# EAGLE board ESP-D1-mini-mainboard-Panel (EAGLE 9.6.2)
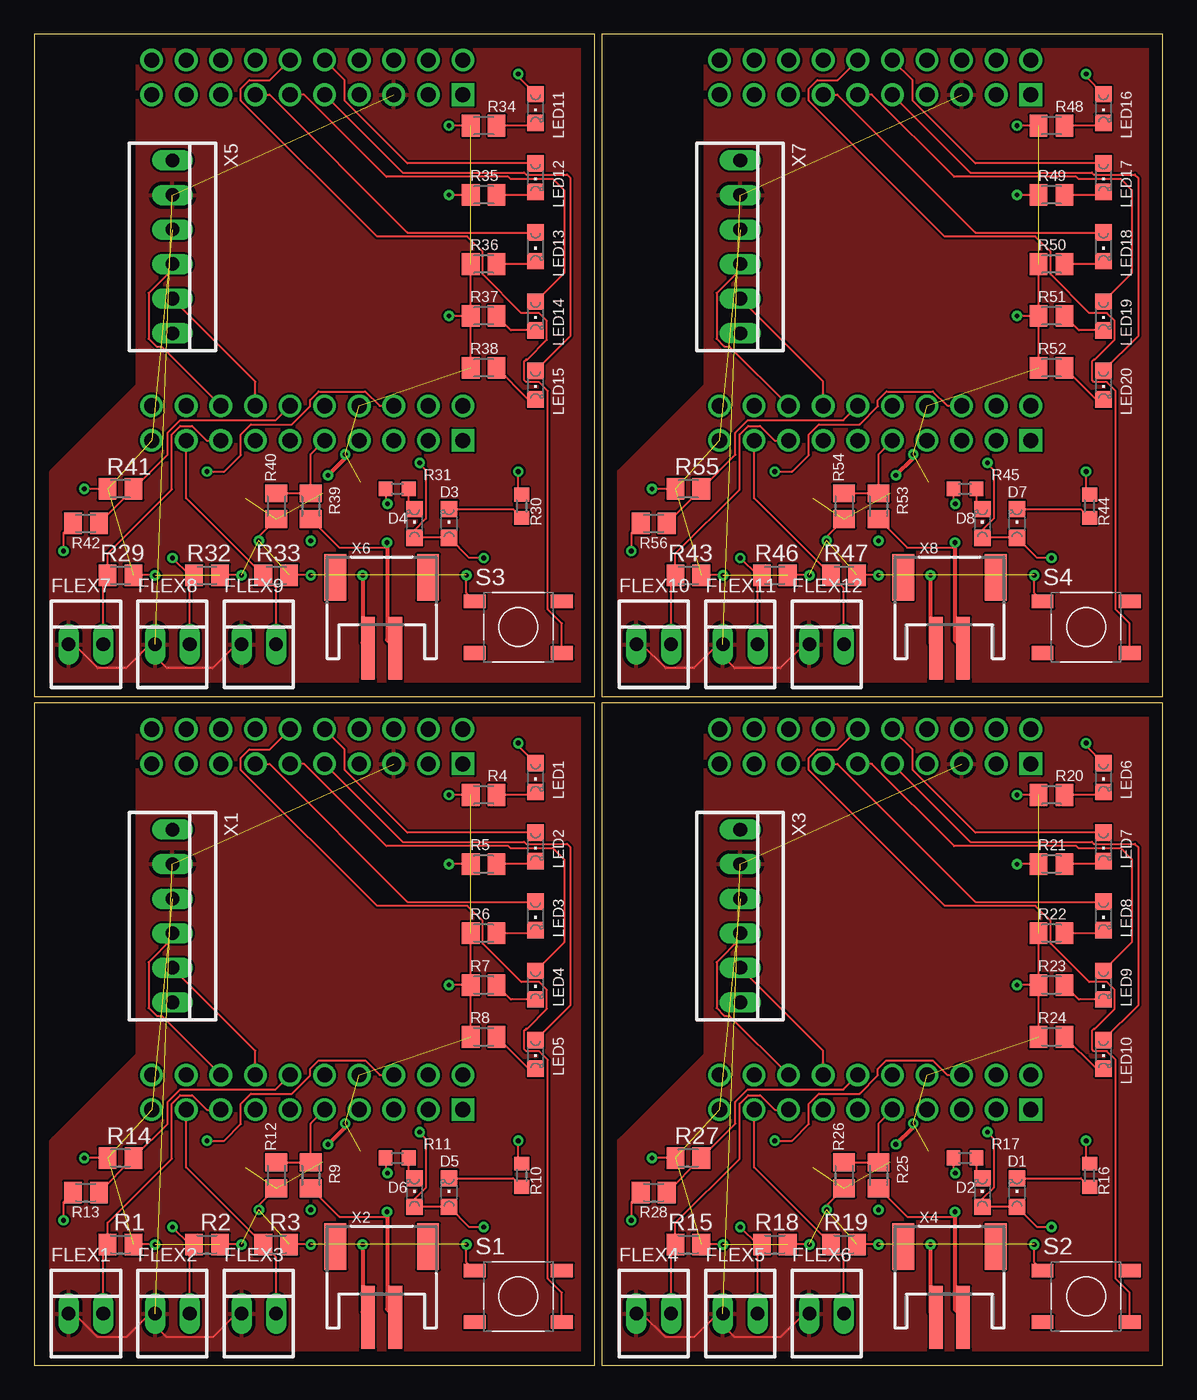
[diagram p0: board, top side]
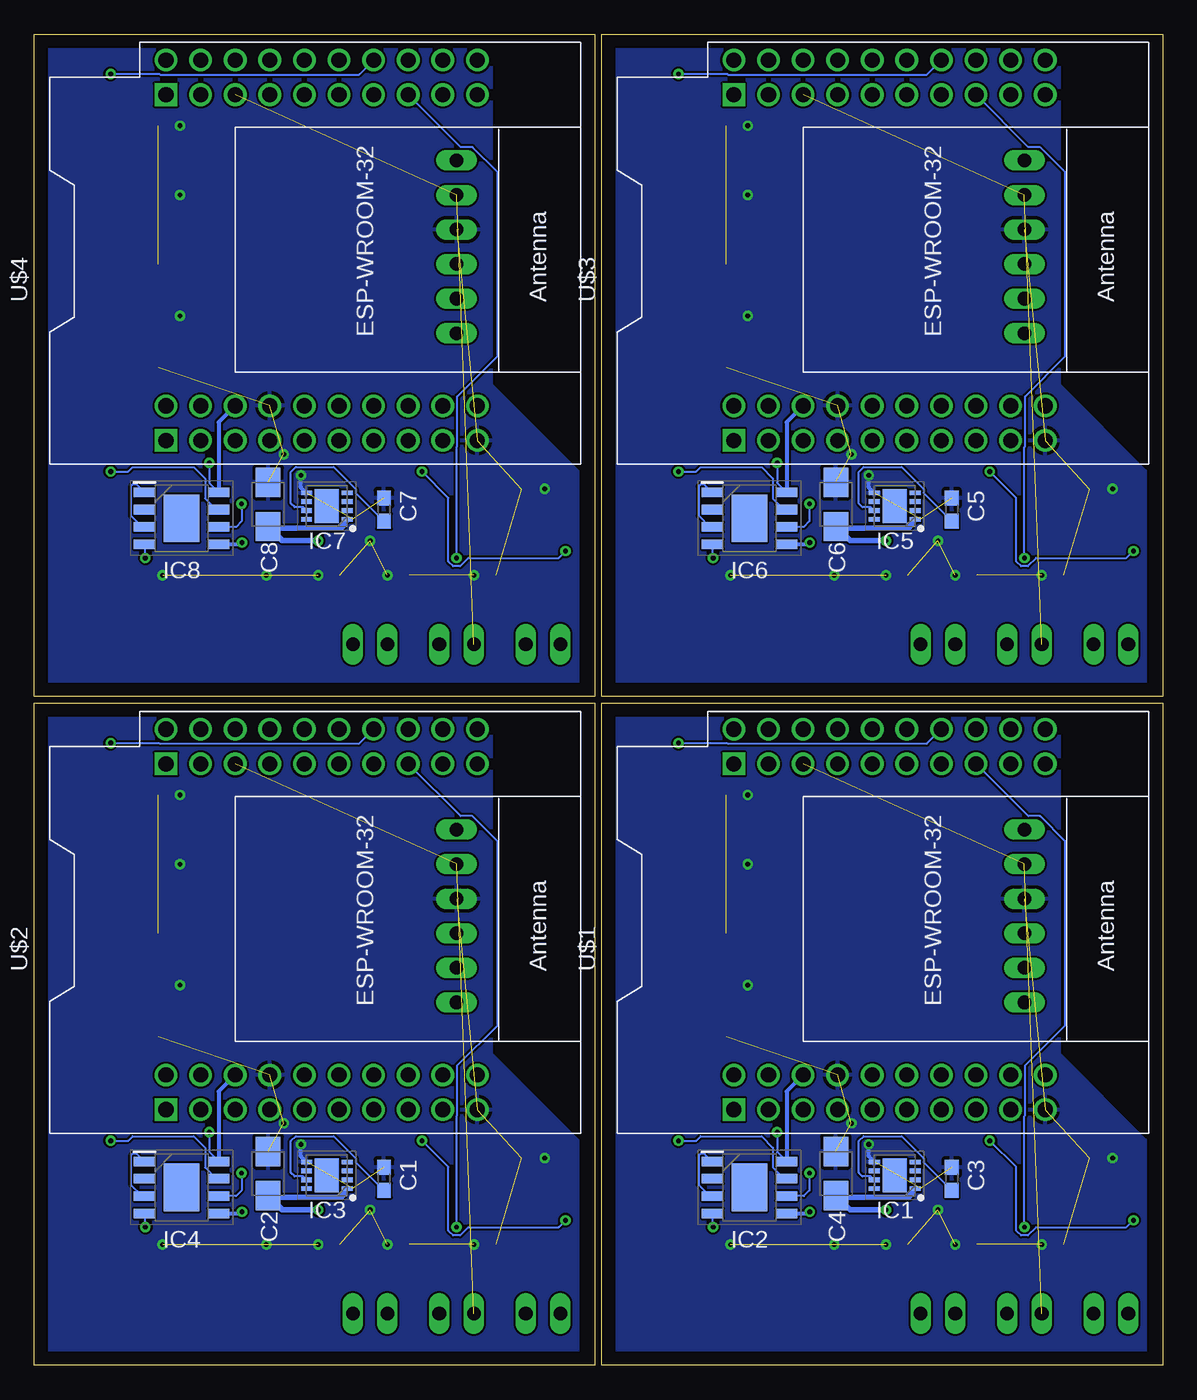
[diagram p1: board, bottom side, seen from below]

Size 82.89 x 97.81 mm. Coordinates in mm from the lower left corner, seen from the top.
Outline: 0,0 41.19,0 41.19,48.65 0,48.65 0,0
Outline: 41.7,0 82.89,0 82.89,48.65 41.7,48.65 41.7,0
Outline: 0,49.16 41.19,49.16 41.19,97.81 0,97.81 0,49.16
Outline: 41.7,49.16 82.89,49.16 82.89,97.81 41.7,97.81 41.7,49.16
Copper layers (1*16): Top 0.035mm / dielectric 1.5mm / Bottom 0.035mm
Design rules "ESP-D1-mini-mainboard": minimum track width 6mil, minimum drill 0.35mm, track to track 6mil, track to pad 6mil, pad to pad 6mil, via to via 6mil, smd to smd 6mil, copper to edge 40mil, drill to drill 6mil, minimum pad ring 10mil, minimum via ring 8mil, stop-mask expansion 4mil, vias tented up to drill 0mil, thermal gap 10mil
Net classes: 2 VCC: width 0.4 mm

## Footprints (pad centres in the part's own frame; a part is rotated, then mirrored left to right if it is on the bottom)
C0603 = smd 1.1 x 1: 1 -0.85,0; 2 0.85,0
B/3528-21W = smd 2.15 x 1.8: + 1.625,0; - -1.625,0
CHIPLED_0805 = smd 1.2 x 1.2: A 0,-1.05; C 0,1.05
22-23-2021 = drill 1 long: 1 -1.27,0; 2 1.27,0
SON65P300X300X100-9N = smd 0.8 x 0.35: 1 -1.5,0.975; 2 -1.5,0.325; 3 -1.5,-0.325; 4 -1.5,-0.975; 5 1.5,-0.975; 6 1.5,-0.325; 7 1.5,0.325; 8 1.5,0.975 | smd 1.75 x 2.5: 9 0,0
SOIC127P600X170-9N = smd 1.55 x 0.7: 1 -2.725,1.905; 2 -2.725,0.635; 3 -2.725,-0.635; 4 -2.725,-1.905; 5 2.725,-1.905; 6 2.725,-0.635; 7 2.725,0.635; 8 2.725,1.905 | smd 2.6 x 3.5: 9 0,0
M0805 = smd 1.3 x 1.6: 1 -0.95,0; 2 0.95,0
R0603 = smd 1 x 1.1: 1 -0.85,0; 2 0.85,0
BUTTON_4_PAD = smd 1.6 x 1: 1 -3.2,1.9; 2 3.2,1.9; 3 -3.2,-1.9; 4 3.2,-1.9
MH-ET_ESP32_D1_MINI = drill 1.11 pad 1.665: 3V3 25.4,-5.08; CMD 27.94,0; GND 0,-22.86; GND2 2.54,-7.62; GND3 27.94,-22.86; IO0 0,-7.62; IO2 0,-5.08; IO4 0,-10.16; IO5 25.4,-7.62; IO16 2.54,-10.16; IO17 2.54,-12.7; IO18 25.4,-15.24; IO19 25.4,-12.7; IO21 2.54,-15.24; IO22 2.54,-17.78; IO23 25.4,-10.16; IO25 0,-17.78; IO26 25.4,-17.78; IO27 0,-20.32; IO32 0,-15.24; IO33 27.94,-12.7; IO34 27.94,-10.16; IO35 27.94,-15.24; NC 27.94,-20.32; NC2 27.94,-5.08; RST 25.4,-22.86; RXD 2.54,-20.32; SD0 2.54,0; SD1 0,-2.54; SD2 27.94,-2.54; SVN 27.94,-17.78; SVP 25.4,-20.32; TCK 25.4,-2.54; TD0 2.54,-2.54; TDI 0,-12.7; TMS 27.94,-7.62; TXD 2.54,-22.86; VCC 2.54,-5.08 | drill 1.11 pad 1.665 square: CLK 0,0; SD3 25.4,0
22-23-2061 = drill 1 long: 1 -6.35,0; 2 -3.81,0; 3 -1.27,0; 4 1.27,0; 5 3.81,0; 6 6.35,0
JSTPH2 = smd 1 x 4.6: 1 -1,-3.7; 2 1,-3.7 | smd 1.6 x 3.4: NC1 -3.4,1.5; NC2 3.4,1.5

## Placement (x,y rotation side)
C1  10u  [C0603]  57.19,13.72 90 bottom
C2  100u  [B/3528-21W]  65.7,14.1 270 bottom
C3  10u  [C0603]  15.49,13.72 90 bottom
C4  100u  [B/3528-21W]  24,14.1 270 bottom
C5  10u  [C0603]  15.49,62.88 90 bottom
C6  100u  [B/3528-21W]  24,63.26 270 bottom
C7  10u  [C0603]  57.19,62.88 90 bottom
C8  100u  [B/3528-21W]  65.7,63.26 270 bottom
D1  GREEN  [CHIPLED_0805]  72.18,12.7 0 top
D2  GREEN  [CHIPLED_0805]  69.64,12.7 0 top
D3  GREEN  [CHIPLED_0805]  30.48,61.86 0 top
D4  GREEN  [CHIPLED_0805]  27.94,61.86 0 top
D5  GREEN  [CHIPLED_0805]  30.48,12.7 0 top
D6  GREEN  [CHIPLED_0805]  27.94,12.7 0 top
D7  GREEN  [CHIPLED_0805]  72.18,61.86 0 top
D8  GREEN  [CHIPLED_0805]  69.64,61.86 0 top
FLEX1  22-23-2021  [22-23-2021]  3.81,3.81 0 top
FLEX2  22-23-2021  [22-23-2021]  10.16,3.81 0 top
FLEX3  22-23-2021  [22-23-2021]  16.51,3.81 0 top
FLEX4  22-23-2021  [22-23-2021]  45.51,3.81 0 top
FLEX5  22-23-2021  [22-23-2021]  51.86,3.81 0 top
FLEX6  22-23-2021  [22-23-2021]  58.21,3.81 0 top
FLEX7  22-23-2021  [22-23-2021]  3.81,52.97 0 top
FLEX8  22-23-2021  [22-23-2021]  10.16,52.97 0 top
FLEX9  22-23-2021  [22-23-2021]  16.51,52.97 0 top
FLEX10  22-23-2021  [22-23-2021]  45.51,52.97 0 top
FLEX11  22-23-2021  [22-23-2021]  51.86,52.97 0 top
FLEX12  22-23-2021  [22-23-2021]  58.21,52.97 0 top
IC1  TPS78533QWDRBRQ1  [SON65P300X300X100-9N]  19.68,13.97 180 bottom
IC2  DIO5508XS8  [SOIC127P600X170-9N]  30.35,13.08 0 bottom
IC3  TPS78533QWDRBRQ1  [SON65P300X300X100-9N]  61.38,13.97 180 bottom
IC4  DIO5508XS8  [SOIC127P600X170-9N]  72.05,13.08 0 bottom
IC5  TPS78533QWDRBRQ1  [SON65P300X300X100-9N]  19.68,63.13 180 bottom
IC6  DIO5508XS8  [SOIC127P600X170-9N]  30.35,62.24 0 bottom
IC7  TPS78533QWDRBRQ1  [SON65P300X300X100-9N]  61.38,63.13 180 bottom
IC8  DIO5508XS8  [SOIC127P600X170-9N]  72.05,62.24 0 bottom
LED1  [CHIPLED_0805]  36.83,43.18 180 top
LED2  [CHIPLED_0805]  36.83,38.1 180 top
LED3  [CHIPLED_0805]  36.83,33.02 180 top
LED4  [CHIPLED_0805]  36.83,27.94 180 top
LED5  [CHIPLED_0805]  36.83,22.86 180 top
LED6  [CHIPLED_0805]  78.53,43.18 180 top
LED7  [CHIPLED_0805]  78.53,38.1 180 top
LED8  [CHIPLED_0805]  78.53,33.02 180 top
LED9  [CHIPLED_0805]  78.53,27.94 180 top
LED10  [CHIPLED_0805]  78.53,22.86 180 top
LED11  [CHIPLED_0805]  36.83,92.34 180 top
LED12  [CHIPLED_0805]  36.83,87.26 180 top
LED13  [CHIPLED_0805]  36.83,82.18 180 top
LED14  [CHIPLED_0805]  36.83,77.1 180 top
LED15  [CHIPLED_0805]  36.83,72.02 180 top
LED16  [CHIPLED_0805]  78.53,92.34 180 top
LED17  [CHIPLED_0805]  78.53,87.26 180 top
LED18  [CHIPLED_0805]  78.53,82.18 180 top
LED19  [CHIPLED_0805]  78.53,77.1 180 top
LED20  [CHIPLED_0805]  78.53,72.02 180 top
R1  15K  [M0805]  6.35,8.89 180 top
R2  15K  [M0805]  12.7,8.89 180 top
R3  15K  [M0805]  17.78,8.89 180 top
R4  1k  [M0805]  33.02,41.91 0 top
R5  1k  [M0805]  33.02,36.83 0 top
R6  1k  [M0805]  33.02,31.75 0 top
R7  1k  [M0805]  33.02,27.94 0 top
R8  1k  [M0805]  33.02,24.13 0 top
R9  10k  [M0805]  20.32,13.97 90 top
R10  470  [R0603]  35.81,13.97 270 top
R11  470  [R0603]  26.67,15.24 0 top
R12  10k  [M0805]  17.78,13.97 90 top
R13  2k  [M0805]  3.81,12.7 180 top
R14  3k  [M0805]  6.35,15.24 0 top
R15  15K  [M0805]  48.05,8.89 180 top
R16  470  [R0603]  77.51,13.97 270 top
R17  470  [R0603]  68.37,15.24 0 top
R18  15K  [M0805]  54.4,8.89 180 top
R19  15K  [M0805]  59.48,8.89 180 top
R20  1k  [M0805]  74.72,41.91 0 top
R21  1k  [M0805]  74.72,36.83 0 top
R22  1k  [M0805]  74.72,31.75 0 top
R23  1k  [M0805]  74.72,27.94 0 top
R24  1k  [M0805]  74.72,24.13 0 top
R25  10k  [M0805]  62.02,13.97 90 top
R26  10k  [M0805]  59.48,13.97 90 top
R27  3k  [M0805]  48.05,15.24 0 top
R28  2k  [M0805]  45.51,12.7 180 top
R29  15K  [M0805]  6.35,58.05 180 top
R30  470  [R0603]  35.81,63.13 270 top
R31  470  [R0603]  26.67,64.4 0 top
R32  15K  [M0805]  12.7,58.05 180 top
R33  15K  [M0805]  17.78,58.05 180 top
R34  1k  [M0805]  33.02,91.07 0 top
R35  1k  [M0805]  33.02,85.99 0 top
R36  1k  [M0805]  33.02,80.91 0 top
R37  1k  [M0805]  33.02,77.1 0 top
R38  1k  [M0805]  33.02,73.29 0 top
R39  10k  [M0805]  20.32,63.13 90 top
R40  10k  [M0805]  17.78,63.13 90 top
R41  3k  [M0805]  6.35,64.4 0 top
R42  2k  [M0805]  3.81,61.86 180 top
R43  15K  [M0805]  48.05,58.05 180 top
R44  470  [R0603]  77.51,63.13 270 top
R45  470  [R0603]  68.37,64.4 0 top
R46  15K  [M0805]  54.4,58.05 180 top
R47  15K  [M0805]  59.48,58.05 180 top
R48  1k  [M0805]  74.72,91.07 0 top
R49  1k  [M0805]  74.72,85.99 0 top
R50  1k  [M0805]  74.72,80.91 0 top
R51  1k  [M0805]  74.72,77.1 0 top
R52  1k  [M0805]  74.72,73.29 0 top
R53  10k  [M0805]  62.02,63.13 90 top
R54  10k  [M0805]  59.48,63.13 90 top
R55  3k  [M0805]  48.05,64.4 0 top
R56  2k  [M0805]  45.51,61.86 180 top
S1  BUTTON  [BUTTON_4_PAD]  35.56,5.08 0 top
S2  BUTTON  [BUTTON_4_PAD]  77.26,5.08 0 top
S3  BUTTON  [BUTTON_4_PAD]  35.56,54.24 0 top
S4  BUTTON  [BUTTON_4_PAD]  77.26,54.24 0 top
U$1  MH-ET_ESP32_D1_MINI  [MH-ET_ESP32_D1_MINI]  31.5,18.8 90 bottom
U$2  MH-ET_ESP32_D1_MINI  [MH-ET_ESP32_D1_MINI]  73.2,18.8 90 bottom
U$3  MH-ET_ESP32_D1_MINI  [MH-ET_ESP32_D1_MINI]  31.5,67.96 90 bottom
U$4  MH-ET_ESP32_D1_MINI  [MH-ET_ESP32_D1_MINI]  73.2,67.96 90 bottom
X1  [22-23-2061]  10.16,33.02 270 top
X2  JSTPH  [JSTPH2]  25.53,7.24 0 top
X3  [22-23-2061]  51.86,33.02 270 top
X4  JSTPH  [JSTPH2]  67.23,7.24 0 top
X5  [22-23-2061]  10.16,82.18 270 top
X6  JSTPH  [JSTPH2]  25.53,56.4 0 top
X7  [22-23-2061]  51.86,82.18 270 top
X8  JSTPH  [JSTPH2]  67.23,56.4 0 top

## Library data of the parts
C1-C8 = rcl; SPICEPREFIX: C
D1-D8 LED1-LED20 R1-R9 R12-R15 R18-R29 R32-R43 R46-R56 = adafruit
FLEX1-FLEX12 = con-molex; MF: MOLEX; MPN: 22-23-2021; OC_FARNELL: 1462926; OC_NEWARK: 25C3832
IC1 IC3 IC5 IC7 = TPS78533QWDRBRQ1; DESCRIPTION: LDO Voltage Regulators Automotive, 1-A, high-accuracy, adjustable low-dropout (LDO) linear regulator; HEIGHT: 1mm; MANUFACTURER_NAME: Texas Instruments; MANUFACTURER_PART_NUMBER: TPS78533QWDRBRQ1; MOUSER_PART_NUMBER: 595-TPS78533QWDRBRQ1; MOUSER_PRICE-STOCK: https://www.mouser.co.uk/ProductDetail/Texas-Instruments/TPS78533QWDRBRQ1?qs=iLbezkQI%252BsiNbdqh2Ko9GQ%3D%3D
IC2 IC4 IC6 IC8 = DIO5508XS8; DESCRIPTION: Battery Management 1A Lithium Ion Battery Charger IC; HEIGHT: 1.7mm; MANUFACTURER_NAME: DIOO Microcircuits; MANUFACTURER_PART_NUMBER: DIO5508XS8; MOUSER_PART_NUMBER: 453-DIO5508XS8; MOUSER_PRICE-STOCK: https://www.mouser.co.uk/ProductDetail/DIOO-Microcircuits/DIO5508XS8?qs=wUXugUrL1qzPv8nEmpxvyA%3D%3D
R10 R11 R16 R17 R30 R31 R44 R45 = rcl; SPICEPREFIX: R
S1-S4 = NFR; DESCRIPTION: Tactile Switch SPST-NO Top Actuated Surface Mount; DIGI-KEY_PART_NUMBER: CKN9104TR-ND; MF: C&K; MP: PTS525SM15SMTR2 LFS; PACKAGE: Tactile Switch CK; PURCHASE-URL: https://pricing.snapeda.com/search/part/PTS525SM15SMTR2 LFS/?ref=eda
U$1-U$4 = MH-ET_ESP32_D1_MINI
X1 X3 X5 X7 = con-molex; MF: MOLEX; MPN: 22-23-2061; OC_FARNELL: 1462922; OC_NEWARK: 27C1933
X2 X4 X6 X8 = microbuilder

## Nets
3V1: FLEX4.1 FLEX5.1 FLEX6.1 U$2.3V3 X3.2
3V2: FLEX7.1 FLEX8.1 FLEX9.1 U$3.3V3 X5.2
3V3: FLEX1.1 FLEX2.1 FLEX3.1 U$1.3V3 X1.2
3V4: FLEX10.1 FLEX11.1 FLEX12.1 U$4.3V3 X7.2
5V: D5.A D6.A IC2.4 IC2.8 R13.2 U$1.VCC
5V1: D1.A D2.A IC4.4 IC4.8 R28.2 U$2.VCC
5V2: D3.A D4.A IC6.4 IC6.8 R42.2 U$3.VCC
5V3: D7.A D8.A IC8.4 IC8.8 R56.2 U$4.VCC
5V_SENSE: R13.1 R14.2 U$1.IO17
5V_SENSE1: R27.2 R28.1 U$2.IO17
5V_SENSE2: R41.2 R42.1 U$3.IO17
5V_SENSE3: R55.2 R56.1 U$4.IO17
+3V1 [VCC]: C2.+ IC3.1
+3V2 [VCC]: C6.+ IC5.1
+3V3 [VCC]: C4.+ IC1.1
+3V4 [VCC]: C8.+ IC7.1
BAT_SENSE: R9.2 R12.2 U$1.IO4
BAT_SENSE1: R25.2 R26.2 U$2.IO4
BAT_SENSE2: R39.2 R40.2 U$3.IO4
BAT_SENSE3: R53.2 R54.2 U$4.IO4
GND: C3.2 C4.- IC1.5 R1.1 R2.1 R3.1 R4.1 R5.1 R6.1 R7.1 R8.1 R12.1 R14.1 S1.1 U$1.GND U$1.GND2 X1.3 X2.1
GND1: C1.2 C2.- IC3.5 R15.1 R18.1 R19.1 R20.1 R21.1 R22.1 R23.1 R24.1 R26.1 R27.1 S2.1 U$2.GND U$2.GND2 X3.3 X4.1
GND2: C5.2 C6.- IC5.5 R29.1 R32.1 R33.1 R34.1 R35.1 R36.1 R37.1 R38.1 R40.1 R41.1 S3.1 U$3.GND U$3.GND2 X5.3 X6.1
GND3: C7.2 C8.- IC7.5 R43.1 R46.1 R47.1 R48.1 R49.1 R50.1 R51.1 R52.1 R54.1 R55.1 S4.1 U$4.GND U$4.GND2 X7.3 X8.1
N$1: LED1.C R4.2
N$2: LED2.C R5.2
N$3: LED3.C R6.2
N$4: LED4.C R7.2
N$5: LED5.C R8.2
N$6: FLEX1.2 R1.2 U$1.IO25
N$7: FLEX2.2 R2.2 U$1.IO26
N$8: FLEX3.2 R3.2 U$1.IO27
N$9: LED1.A U$1.IO35
N$10: LED2.A U$1.IO34
N$11: S1.4 U$1.IO33
N$12: LED3.A U$1.IO18
N$13: IC2.1 IC2.3
N$14: D5.C R10.2
N$15: D6.C R11.2
N$16: IC2.7 R10.1
N$17: IC2.6 R11.1
N$18: C3.1 IC1.7 IC1.8
N$19: LED4.A U$1.IO19
N$20: LED5.A U$1.IO23
N$21: FLEX4.2 R15.2 U$2.IO25
N$22: FLEX5.2 R18.2 U$2.IO26
N$23: FLEX6.2 R19.2 U$2.IO27
N$24: S2.4 U$2.IO33
N$25: IC4.1 IC4.3
N$26: D1.C R16.2
N$27: D2.C R17.2
N$28: IC4.7 R16.1
N$29: IC4.6 R17.1
N$30: C1.1 IC3.7 IC3.8
N$31: LED6.C R20.2
N$32: LED7.C R21.2
N$33: LED8.C R22.2
N$34: LED9.C R23.2
N$35: LED10.C R24.2
N$36: LED6.A U$2.IO35
N$37: LED7.A U$2.IO34
N$38: LED8.A U$2.IO18
N$39: LED9.A U$2.IO19
N$40: LED10.A U$2.IO23
N$41: FLEX7.2 R29.2 U$3.IO25
N$42: FLEX8.2 R32.2 U$3.IO26
N$43: FLEX9.2 R33.2 U$3.IO27
N$44: S3.4 U$3.IO33
N$45: IC6.1 IC6.3
N$46: D3.C R30.2
N$47: D4.C R31.2
N$48: IC6.7 R30.1
N$49: IC6.6 R31.1
N$50: C5.1 IC5.7 IC5.8
N$51: LED11.C R34.2
N$52: LED12.C R35.2
N$53: LED13.C R36.2
N$54: LED14.C R37.2
N$55: LED15.C R38.2
N$56: LED11.A U$3.IO35
N$57: LED12.A U$3.IO34
N$58: LED13.A U$3.IO18
N$59: LED14.A U$3.IO19
N$60: LED15.A U$3.IO23
N$61: FLEX10.2 R43.2 U$4.IO25
N$62: FLEX11.2 R46.2 U$4.IO26
N$63: FLEX12.2 R47.2 U$4.IO27
N$64: S4.4 U$4.IO33
N$65: IC8.1 IC8.3
N$66: D7.C R44.2
N$67: D8.C R45.2
N$68: IC8.7 R44.1
N$69: IC8.6 R45.1
N$70: C7.1 IC7.7 IC7.8
N$71: LED16.C R48.2
N$72: LED17.C R49.2
N$73: LED18.C R50.2
N$74: LED19.C R51.2
N$75: LED20.C R52.2
N$76: LED16.A U$4.IO35
N$77: LED17.A U$4.IO34
N$78: LED18.A U$4.IO18
N$79: LED19.A U$4.IO19
N$80: LED20.A U$4.IO23
SCL: U$1.IO22 X1.4
SCL1: U$2.IO22 X3.4
SCL2: U$3.IO22 X5.4
SCL3: U$4.IO22 X7.4
SDA: U$1.IO21 X1.5
SDA1: U$2.IO21 X3.5
SDA2: U$3.IO21 X5.5
SDA3: U$4.IO21 X7.5
VBAT: IC2.5 R9.1 X2.2
VBAT1: IC4.5 R25.1 X4.2
VBAT2: IC6.5 R39.1 X6.2
VBAT3: IC8.5 R53.1 X8.2

## Tracks (layer width: path | path; a pad name or v marks a point on that pad's centre or on a via)
3V1  (2 unrouted)
  Top 0.152: FLEX6.1 56.54,3.81 54.81,2.07 51.45,2.07 50.59,2.94 FLEX5.1 50.19,3.81 48.46,2.07 46.37,2.07 44.64,3.81 FLEX4.1
  pour Top: 42.97,0 42.97,16.51 49.32,22.86 49.32,48.26 82.34,48.26 82.34,0
3V2  (2 unrouted)
  Top 0.152: FLEX9.1 14.84,52.97 13.11,51.23 9.75,51.23 8.89,52.1 FLEX8.1 8.49,52.97 6.76,51.23 4.67,51.23 2.94,52.97 FLEX7.1
  pour Top: 1.27,49.16 1.27,65.67 7.62,72.02 7.62,97.42 40.64,97.42 40.64,49.16
3V3  (2 unrouted)
  Top 0.152: FLEX3.1 14.84,3.81 13.11,2.07 9.75,2.07 8.89,2.94 FLEX2.1 8.49,3.81 6.76,2.07 4.67,2.07 2.94,3.81 FLEX1.1
  pour Top: 1.27,0 1.27,16.51 7.62,22.86 7.62,48.26 40.64,48.26 40.64,0
3V4  (2 unrouted)
  Top 0.152: FLEX12.1 56.54,52.97 54.81,51.23 51.45,51.23 50.59,52.1 FLEX11.1 50.19,52.97 48.46,51.23 46.37,51.23 44.64,52.97 FLEX10.1
  pour Top: 42.97,49.16 42.97,65.67 49.32,72.02 49.32,97.42 82.34,97.42 82.34,49.16
5V  (via drill 0.35)
  Top 0.152: v33.02,10.16 31.97,10.16 D5.A D6.A 27.94,12.23 28.77,13.05 28.77,16.64 28.32,17.08 v28.32,17.14 | R13.2 2.16,12 v2.16,10.67 | v12.7,16.51 13.97,16.51 15.2,17.73 15.2,19.24 15.93,19.97 18.93,19.97 20.27,21.31 20.27,21.78 20.9,22.4 24.32,22.4 25.38,21.34 U$1.VCC
  Bottom 0.152: IC2.4 33.08,10.22 v33.02,10.16 | IC2.8 28.32,15.68 v28.32,17.14 | v2.16,10.67 2.67,10.16 9.3,10.16 9.91,9.55 10.41,9.55 10.77,9.91 10.77,14.58 v12.7,16.51
  Bottom 0.305: U$1.VCC 27.63,20.12 IC2.8
5V1  (via drill 0.35)
  Top 0.152: v74.72,10.16 73.67,10.16 D1.A D2.A 69.64,12.23 70.47,13.05 70.47,16.64 70.02,17.08 v70.02,17.14 | R28.2 43.86,12 v43.86,10.67 | v54.4,16.51 55.67,16.51 56.89,17.73 56.89,19.24 57.63,19.97 60.63,19.97 61.97,21.31 61.97,21.78 62.6,22.4 66.02,22.4 67.08,21.34 U$2.VCC
  Bottom 0.152: IC4.4 74.78,10.22 v74.72,10.16 | IC4.8 70.02,15.68 v70.02,17.14 | v43.86,10.67 44.37,10.16 51,10.16 51.61,9.55 52.11,9.55 52.47,9.91 52.47,14.58 v54.4,16.51
  Bottom 0.305: U$2.VCC 69.33,20.12 IC4.8
5V2  (via drill 0.35)
  Top 0.152: v33.02,59.32 31.97,59.32 D3.A D4.A 27.94,61.39 28.77,62.21 28.77,65.79 28.32,66.24 v28.32,66.3 | R42.2 2.16,61.16 v2.16,59.83 | v12.7,65.67 13.97,65.67 15.2,66.89 15.2,68.39 15.93,69.13 18.93,69.13 20.27,70.47 20.27,70.94 20.9,71.56 24.32,71.56 25.38,70.5 U$3.VCC
  Bottom 0.152: IC6.4 33.08,59.38 v33.02,59.32 | IC6.8 28.32,64.84 v28.32,66.3 | v2.16,59.83 2.67,59.32 9.3,59.32 9.91,58.71 10.41,58.71 10.77,59.07 10.77,63.74 v12.7,65.67
  Bottom 0.305: U$3.VCC 27.63,69.28 IC6.8
5V3  (via drill 0.35)
  Top 0.152: v74.72,59.32 73.67,59.32 D7.A D8.A 69.64,61.39 70.47,62.21 70.47,65.79 70.02,66.24 v70.02,66.3 | R56.2 43.86,61.16 v43.86,59.83 | v54.4,65.67 55.67,65.67 56.89,66.89 56.89,68.39 57.63,69.13 60.63,69.13 61.97,70.47 61.97,70.94 62.6,71.56 66.02,71.56 67.08,70.5 U$4.VCC
  Bottom 0.152: IC8.4 74.78,59.38 v74.72,59.32 | IC8.8 70.02,64.84 v70.02,66.3 | v43.86,59.83 44.37,59.32 51,59.32 51.61,58.71 52.11,58.71 52.47,59.07 52.47,63.74 v54.4,65.67
  Bottom 0.305: U$4.VCC 69.33,69.28 IC8.8
5V_SENSE
  Top 0.152: R13.1 R14.2 9.81,17.75 9.81,19.36 10.72,20.27 17.73,20.27 U$1.IO17
5V_SENSE1
  Top 0.152: R28.1 R27.2 51.51,17.75 51.51,19.36 52.42,20.27 59.43,20.27 U$2.IO17
5V_SENSE2
  Top 0.152: R42.1 R41.2 9.81,66.91 9.81,68.52 10.72,69.43 17.73,69.43 U$3.IO17
5V_SENSE3
  Top 0.152: R56.1 R55.2 51.51,66.91 51.51,68.52 52.42,69.43 59.43,69.43 U$4.IO17
+3V1  (via drill 0.35)
  Bottom 0.4: IC3.1 60.16,12.72 60.16,12.57 60.36,12.37 65.6,12.37 C2.+ 64.66,11.43 v62.02,11.43
+3V2  (via drill 0.35)
  Bottom 0.4: IC5.1 18.46,61.88 18.46,61.73 18.66,61.53 23.9,61.53 C6.+ 22.96,60.59 v20.32,60.59
+3V3  (via drill 0.35)
  Bottom 0.4: IC1.1 18.46,12.72 18.46,12.57 18.66,12.37 23.9,12.37 C4.+ 22.96,11.43 v20.32,11.43
+3V4  (via drill 0.35)
  Bottom 0.4: IC7.1 60.16,61.88 60.16,61.73 60.36,61.53 65.6,61.53 C8.+ 64.66,60.59 v62.02,60.59
BAT_SENSE
  Top 0.152: R12.2 R9.2 20.32,17.78 U$1.IO4
BAT_SENSE1
  Top 0.152: R26.2 R25.2 62.02,17.78 U$2.IO4
BAT_SENSE2
  Top 0.152: R40.2 R39.2 20.32,66.94 U$3.IO4
BAT_SENSE3
  Top 0.152: R54.2 R53.2 62.02,66.94 U$4.IO4
GND  (via drill 0.35)  (15 unrouted)
  Top 0.152: v8.89,8.89 R1.1 | v15.24,8.89 R2.1 | v20.32,8.89 R3.1 | S1.1 31.75,7.59 v31.75,8.89 | R8.1 R7.1 | R7.1 R6.1 | R7.1 v30.48,27.94 | R5.1 v30.48,36.83 | R4.1 v30.48,41.91 | R12.1 16.51,11.75 v16.51,11.43 | R14.1 v3.68,15.24
  Top 0.305: v24.13,8.89 24.13,3.94 X2.1 | v21.59,16.24 22.86,17.51 v22.86,17.78
  Bottom 0.305: IC1.5 21.59,15.35 v21.59,16.24
  pour Bottom: 1.27,0 1.27,16.51 7.62,22.86 7.62,48.26 40.64,48.26 40.64,0
GND1  (via drill 0.35)  (15 unrouted)
  Top 0.152: v50.59,8.89 R15.1 | v56.94,8.89 R18.1 | v62.02,8.89 R19.1 | S2.1 73.45,7.59 v73.45,8.89 | R24.1 R23.1 | R23.1 R22.1 | R23.1 v72.18,27.94 | R21.1 v72.18,36.83 | R20.1 v72.18,41.91 | R26.1 58.21,11.75 v58.21,11.43 | R27.1 v45.38,15.24
  Top 0.305: v65.83,8.89 65.83,3.94 X4.1 | v63.29,16.24 64.56,17.51 v64.56,17.78
  Bottom 0.305: IC3.5 63.29,15.35 v63.29,16.24
  pour Bottom: 42.97,0 42.97,16.51 49.32,22.86 49.32,48.26 82.34,48.26 82.34,0
GND2  (via drill 0.35)  (15 unrouted)
  Top 0.152: v8.89,58.05 R29.1 | v15.24,58.05 R32.1 | v20.32,58.05 R33.1 | S3.1 31.75,56.75 v31.75,58.05 | R38.1 R37.1 | R37.1 R36.1 | R37.1 v30.48,77.1 | R35.1 v30.48,85.99 | R34.1 v30.48,91.07 | R40.1 16.51,60.91 v16.51,60.59 | R41.1 v3.68,64.4
  Top 0.305: v24.13,58.05 24.13,53.09 X6.1 | v21.59,65.4 22.86,66.67 v22.86,66.94
  Bottom 0.305: IC5.5 21.59,64.51 v21.59,65.4
  pour Bottom: 1.27,49.16 1.27,65.67 7.62,72.02 7.62,97.42 40.64,97.42 40.64,49.16
GND3  (via drill 0.35)  (15 unrouted)
  Top 0.152: v50.59,58.05 R43.1 | v56.94,58.05 R46.1 | v62.02,58.05 R47.1 | S4.1 73.45,56.75 v73.45,58.05 | R52.1 R51.1 | R51.1 R50.1 | R51.1 v72.18,77.1 | R49.1 v72.18,85.99 | R48.1 v72.18,91.07 | R54.1 58.21,60.91 v58.21,60.59 | R55.1 v45.38,64.4
  Top 0.305: v65.83,58.05 65.83,53.09 X8.1 | v63.29,65.4 64.56,66.67 v64.56,66.94
  Bottom 0.305: IC7.5 63.29,64.51 v63.29,65.4
  pour Bottom: 42.97,49.16 42.97,65.67 49.32,72.02 49.32,97.42 82.34,97.42 82.34,49.16
N$1
  Top 0.152: LED1.C 36.61,41.91 R4.2
N$2
  Top 0.152: LED2.C 36.61,36.83 R5.2
N$3
  Top 0.152: LED3.C 36.61,31.75 R6.2
N$4
  Top 0.152: LED4.C 35.02,26.89 R7.2
N$5
  Top 0.152: LED5.C 36.29,21.81 R8.2
N$6
  Top 0.152: FLEX1.2 5.08,8.57 R1.2 5.4,10.48 10.12,15.2 10.12,19.24 10.74,19.86 11.62,19.86 12.68,18.8 U$1.IO25
N$7  (via drill 0.35)
  Top 0.152: FLEX2.2 11.43,8.57 R2.2 11.43,8.89 v10.16,10.16
  Bottom 0.152: v10.16,10.16 10.16,18.31 10.12,18.36 10.12,22.03 7.15,24.99 7.15,38.51 9,40.35 9.87,40.35 U$1.IO26
N$8
  Top 0.152: FLEX3.2 17.78,7.94 R3.2 11.18,14.54 U$1.IO27
N$9  (via drill 0.35)
  Top 0.152: LED1.A 35.56,45.5 v35.56,45.72
  Bottom 0.152: v35.56,45.72 31.98,45.72 31.94,45.67 17.32,45.67 U$1.IO35
N$10
  Top 0.152: U$1.IO34 22.82,45.26 22.82,43.76 27.42,39.15 LED2.A
N$11
  Top 0.152: S1.4 38.76,5.36 37.73,6.38 37.73,22.43 37.08,23.08 36.13,23.08 36,23.21 36,24.61 36.13,24.74 36.2,24.74 37.66,26.2 37.66,27.59 37.08,28.16 35.78,28.16 32.95,31 32.95,32.65 31.83,33.77 25.19,33.77 15.2,43.76 15.2,44.64 15.82,45.26 17.32,45.26 U$1.IO33
N$12
  Top 0.152: U$1.IO18 17.3,44.2 27.42,34.07 LED3.A
N$13
  Bottom 0.152: IC2.1 33.66,15.56 33.95,15.56 34.08,15.43 34.08,13.27 33.26,12.45 IC2.3
N$14
  Top 0.152: D5.C 35.18,13.75 R10.2
N$15
  Top 0.152: D6.C 27.52,14.17 R11.2
N$16  (via drill 0.35)
  Top 0.152: R10.1 35.56,15.07 v35.56,16.51
  Bottom 0.152: IC2.7 27.81,13.72 28.63,14.54 28.63,16 29.46,16.84 33.95,16.84 34.27,16.51 v35.56,16.51
N$17  (via drill 0.35)
  Top 0.152: R11.1 25.82,14.27 v25.95,14.14
  Bottom 0.152: v25.95,14.14 25.95,12.85 26.36,12.45 IC2.6
N$18
  Bottom 0.152: C3.1 17.56,14.93 17.56,15.21 19.19,16.85 21.96,16.85 22.32,16.48 22.32,14.15 22.06,13.89 21.43,13.89 IC1.7 IC1.8
N$19
  Top 0.152: U$1.IO19 19.84,44.2 25.87,38.16 34.84,38.16 34.99,38.02 38.1,38.02 38.93,37.19 38.93,31.09 LED4.A
N$20
  Top 0.152: U$1.IO23 27.06,38.47 35.99,38.47 36.13,38.32 39.15,38.32 39.37,38.1 39.37,26.45 LED5.A
N$21
  Top 0.152: FLEX4.2 46.78,8.57 R15.2 47.1,10.48 51.81,15.2 51.81,19.24 52.44,19.86 53.31,19.86 54.38,18.8 U$2.IO25
N$22  (via drill 0.35)
  Top 0.152: FLEX5.2 53.13,8.57 R18.2 53.13,8.89 v51.86,10.16
  Bottom 0.152: v51.86,10.16 51.86,18.31 51.81,18.36 51.81,22.03 48.85,24.99 48.85,38.51 50.7,40.35 51.57,40.35 U$2.IO26
N$23
  Top 0.152: FLEX6.2 59.48,7.94 R19.2 52.88,14.54 U$2.IO27
N$24
  Top 0.152: S2.4 80.46,5.36 79.43,6.38 79.43,22.43 78.78,23.08 77.83,23.08 77.7,23.21 77.7,24.61 77.83,24.74 77.9,24.74 79.36,26.2 79.36,27.59 78.78,28.16 77.48,28.16 74.65,31 74.65,32.65 73.53,33.77 66.89,33.77 56.89,43.76 56.89,44.64 57.52,45.26 59.02,45.26 U$2.IO33
N$25
  Bottom 0.152: IC4.1 75.36,15.56 75.65,15.56 75.78,15.43 75.78,13.27 74.95,12.45 IC4.3
N$26
  Top 0.152: D1.C 76.88,13.75 R16.2
N$27
  Top 0.152: D2.C 69.22,14.17 R17.2
N$28  (via drill 0.35)
  Top 0.152: R16.1 77.26,15.07 v77.26,16.51
  Bottom 0.152: IC4.7 69.5,13.72 70.33,14.54 70.33,16 71.16,16.84 75.65,16.84 75.97,16.51 v77.26,16.51
N$29  (via drill 0.35)
  Top 0.152: R17.1 67.52,14.27 v67.65,14.14
  Bottom 0.152: v67.65,14.14 67.65,12.85 68.06,12.45 IC4.6
N$30
  Bottom 0.152: C1.1 59.26,14.93 59.26,15.21 60.89,16.85 63.66,16.85 64.02,16.48 64.02,14.15 63.76,13.89 63.13,13.89 IC3.7 IC3.8
N$31
  Top 0.152: LED6.C 78.31,41.91 R20.2
N$32
  Top 0.152: LED7.C 78.31,36.83 R21.2
N$33
  Top 0.152: LED8.C 78.31,31.75 R22.2
N$34
  Top 0.152: LED9.C 76.72,26.89 R23.2
N$35
  Top 0.152: LED10.C 77.99,21.81 R24.2
N$36  (via drill 0.35)
  Top 0.152: LED6.A 77.26,45.5 v77.26,45.72
  Bottom 0.152: v77.26,45.72 73.68,45.72 73.64,45.67 59.02,45.67 U$2.IO35
N$37
  Top 0.152: U$2.IO34 64.51,45.26 64.51,43.76 69.12,39.15 LED7.A
N$38
  Top 0.152: U$2.IO18 58.99,44.2 69.12,34.07 LED8.A
N$39
  Top 0.152: U$2.IO19 61.53,44.2 67.57,38.16 76.54,38.16 76.69,38.02 79.8,38.02 80.63,37.19 80.63,31.09 LED9.A
N$40
  Top 0.152: U$2.IO23 68.76,38.47 77.69,38.47 77.83,38.32 80.85,38.32 81.07,38.1 81.07,26.45 LED10.A
N$41
  Top 0.152: FLEX7.2 5.08,57.73 R29.2 5.4,59.64 10.12,64.35 10.12,68.39 10.74,69.02 11.62,69.02 12.68,67.95 U$3.IO25
N$42  (via drill 0.35)
  Top 0.152: FLEX8.2 11.43,57.73 R32.2 11.43,58.05 v10.16,59.32
  Bottom 0.152: v10.16,59.32 10.16,67.47 10.12,67.52 10.12,71.19 7.15,74.15 7.15,87.67 9,89.51 9.87,89.51 U$3.IO26
N$43
  Top 0.152: FLEX9.2 17.78,57.1 R33.2 11.18,63.7 U$3.IO27
N$44
  Top 0.152: S3.4 38.76,54.52 37.73,55.54 37.73,71.59 37.08,72.24 36.13,72.24 36,72.37 36,73.76 36.13,73.9 36.2,73.9 37.66,75.35 37.66,76.74 37.08,77.32 35.78,77.32 32.95,80.16 32.95,81.8 31.83,82.92 25.19,82.92 15.2,92.92 15.2,93.8 15.82,94.42 17.32,94.42 U$3.IO33
N$45
  Bottom 0.152: IC6.1 33.66,64.72 33.95,64.72 34.08,64.59 34.08,62.43 33.26,61.6 IC6.3
N$46
  Top 0.152: D3.C 35.18,62.91 R30.2
N$47
  Top 0.152: D4.C 27.52,63.33 R31.2
N$48  (via drill 0.35)
  Top 0.152: R30.1 35.56,64.23 v35.56,65.67
  Bottom 0.152: IC6.7 27.81,62.88 28.63,63.7 28.63,65.16 29.46,65.99 33.95,65.99 34.27,65.67 v35.56,65.67
N$49  (via drill 0.35)
  Top 0.152: R31.1 25.82,63.43 v25.95,63.3
  Bottom 0.152: v25.95,63.3 25.95,62.01 26.36,61.6 IC6.6
N$50
  Bottom 0.152: C5.1 17.56,64.09 17.56,64.37 19.19,66 21.96,66 22.32,65.64 22.32,63.31 22.06,63.05 21.43,63.05 IC5.7 IC5.8
N$51
  Top 0.152: LED11.C 36.61,91.07 R34.2
N$52
  Top 0.152: LED12.C 36.61,85.99 R35.2
N$53
  Top 0.152: LED13.C 36.61,80.91 R36.2
N$54
  Top 0.152: LED14.C 35.02,76.05 R37.2
N$55
  Top 0.152: LED15.C 36.29,70.97 R38.2
N$56  (via drill 0.35)
  Top 0.152: LED11.A 35.56,94.66 v35.56,94.88
  Bottom 0.152: v35.56,94.88 31.98,94.88 31.94,94.83 17.32,94.83 U$3.IO35
N$57
  Top 0.152: U$3.IO34 22.82,94.42 22.82,92.92 27.42,88.31 LED12.A
N$58
  Top 0.152: U$3.IO18 17.3,93.36 27.42,83.23 LED13.A
N$59
  Top 0.152: U$3.IO19 19.84,93.36 25.87,87.32 34.84,87.32 34.99,87.18 38.1,87.18 38.93,86.35 38.93,80.25 LED14.A
N$60
  Top 0.152: U$3.IO23 27.06,87.63 35.99,87.63 36.13,87.48 39.15,87.48 39.37,87.26 39.37,75.61 LED15.A
N$61
  Top 0.152: FLEX10.2 46.78,57.73 R43.2 47.1,59.64 51.81,64.35 51.81,68.39 52.44,69.02 53.31,69.02 54.38,67.95 U$4.IO25
N$62  (via drill 0.35)
  Top 0.152: FLEX11.2 53.13,57.73 R46.2 53.13,58.05 v51.86,59.32
  Bottom 0.152: v51.86,59.32 51.86,67.47 51.81,67.52 51.81,71.19 48.85,74.15 48.85,87.67 50.7,89.51 51.57,89.51 U$4.IO26
N$63
  Top 0.152: FLEX12.2 59.48,57.1 R47.2 52.88,63.7 U$4.IO27
N$64
  Top 0.152: S4.4 80.46,54.52 79.43,55.54 79.43,71.59 78.78,72.24 77.83,72.24 77.7,72.37 77.7,73.76 77.83,73.9 77.9,73.9 79.36,75.35 79.36,76.74 78.78,77.32 77.48,77.32 74.65,80.16 74.65,81.8 73.53,82.92 66.89,82.92 56.89,92.92 56.89,93.8 57.52,94.42 59.02,94.42 U$4.IO33
N$65
  Bottom 0.152: IC8.1 75.36,64.72 75.65,64.72 75.78,64.59 75.78,62.43 74.95,61.6 IC8.3
N$66
  Top 0.152: D7.C 76.88,62.91 R44.2
N$67
  Top 0.152: D8.C 69.22,63.33 R45.2
N$68  (via drill 0.35)
  Top 0.152: R44.1 77.26,64.23 v77.26,65.67
  Bottom 0.152: IC8.7 69.5,62.88 70.33,63.7 70.33,65.16 71.16,65.99 75.65,65.99 75.97,65.67 v77.26,65.67
N$69  (via drill 0.35)
  Top 0.152: R45.1 67.52,63.43 v67.65,63.3
  Bottom 0.152: v67.65,63.3 67.65,62.01 68.06,61.6 IC8.6
N$70
  Bottom 0.152: C7.1 59.26,64.09 59.26,64.37 60.89,66 63.66,66 64.02,65.64 64.02,63.31 63.76,63.05 63.13,63.05 IC7.7 IC7.8
N$71
  Top 0.152: LED16.C 78.31,91.07 R48.2
N$72
  Top 0.152: LED17.C 78.31,85.99 R49.2
N$73
  Top 0.152: LED18.C 78.31,80.91 R50.2
N$74
  Top 0.152: LED19.C 76.72,76.05 R51.2
N$75
  Top 0.152: LED20.C 77.99,70.97 R52.2
N$76  (via drill 0.35)
  Top 0.152: LED16.A 77.26,94.66 v77.26,94.88
  Bottom 0.152: v77.26,94.88 73.68,94.88 73.64,94.83 59.02,94.83 U$4.IO35
N$77
  Top 0.152: U$4.IO34 64.51,94.42 64.51,92.92 69.12,88.31 LED17.A
N$78
  Top 0.152: U$4.IO18 58.99,93.36 69.12,83.23 LED18.A
N$79
  Top 0.152: U$4.IO19 61.53,93.36 67.57,87.32 76.54,87.32 76.69,87.18 79.8,87.18 80.63,86.35 80.63,80.25 LED19.A
N$80
  Top 0.152: U$4.IO23 68.76,87.63 77.69,87.63 77.83,87.48 80.85,87.48 81.07,87.26 81.07,75.61 LED20.A
SCL
  Top 0.152: X1.4 10.16,31.35 8.42,29.62 8.42,26.26 9,25.69 9.37,25.69 U$1.IO22
SCL1
  Top 0.152: X3.4 51.86,31.35 50.12,29.62 50.12,26.26 50.7,25.69 51.06,25.69 U$2.IO22
SCL2
  Top 0.152: X5.4 10.16,80.51 8.42,78.78 8.42,75.42 9,74.85 9.37,74.85 U$3.IO22
SCL3
  Top 0.152: X7.4 51.86,80.51 50.12,78.78 50.12,75.42 50.7,74.85 51.06,74.85 U$4.IO22
SDA
  Top 0.152: U$1.IO21 16.26,23.11 X1.5
SDA1
  Top 0.152: U$2.IO21 57.95,23.11 X3.5
SDA2
  Top 0.152: U$3.IO21 16.26,72.27 X5.5
SDA3
  Top 0.152: U$4.IO21 57.95,72.27 X7.5
VBAT  (via drill 0.35)
  Top 0.152: R9.1 22.42,10.92 25.92,10.92
  Top 0.305: v25.92,11.29 25.92,10.92 25.92,4.14 X2.2
  Bottom 0.305: v25.92,11.29 26.04,11.18 IC2.5
VBAT1  (via drill 0.35)
  Top 0.152: R25.1 64.12,10.92 67.62,10.92
  Top 0.305: v67.62,11.29 67.62,10.92 67.62,4.14 X4.2
  Bottom 0.305: v67.62,11.29 67.73,11.18 IC4.5
VBAT2  (via drill 0.35)
  Top 0.152: R39.1 22.42,60.08 25.92,60.08
  Top 0.305: v25.92,60.45 25.92,60.08 25.92,53.3 X6.2
  Bottom 0.305: v25.92,60.45 26.04,60.34 IC6.5
VBAT3  (via drill 0.35)
  Top 0.152: R53.1 64.12,60.08 67.62,60.08
  Top 0.305: v67.62,60.45 67.62,60.08 67.62,53.3 X8.2
  Bottom 0.305: v67.62,60.45 67.73,60.34 IC8.5